# Altium PCB Board.PcbDoc
Units mm, origin at the board's own origin, x right, y up, seen from the top; angles counter-clockwise.
Board outline 38 x 15 mm, 2 copper layers (Top Layer, Bottom Layer), stack 1.57 mm thick; 33 components, 22 nets, 115 pads, 25 vias.
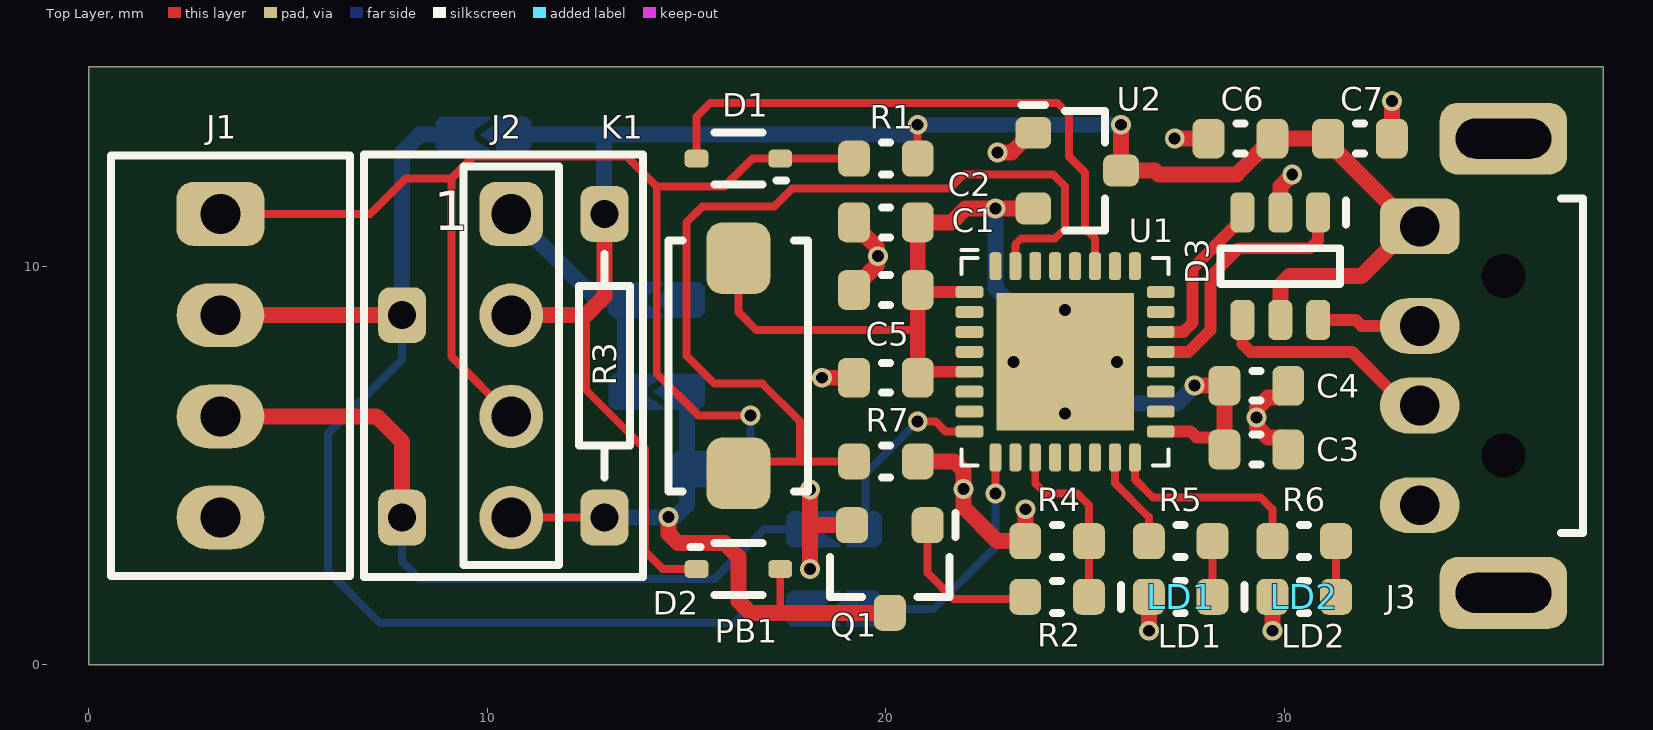
[diagram p0: Top Layer view]
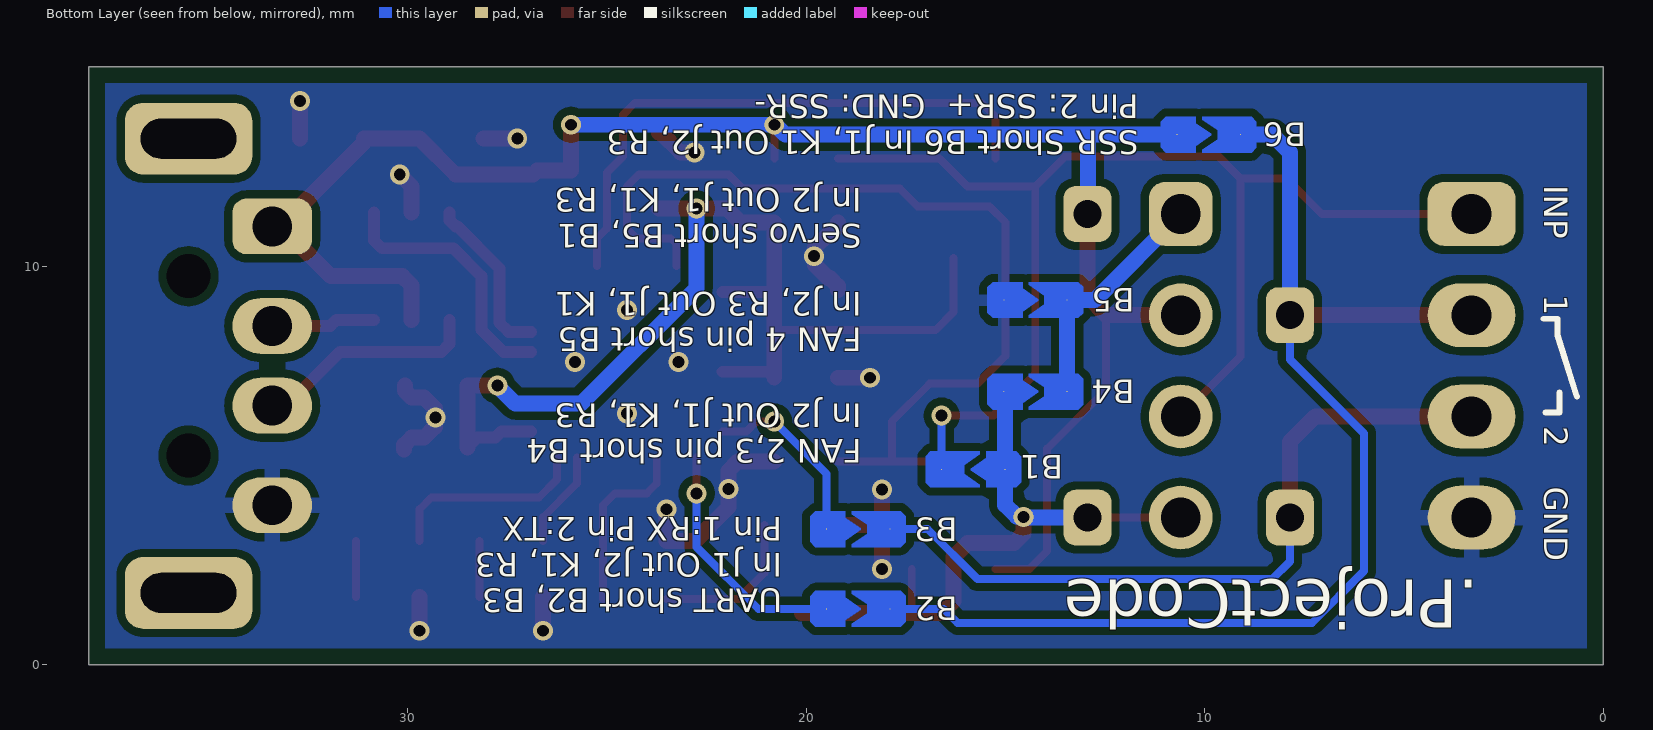
[diagram p1: Bottom Layer view, seen from below]

## Layer stack, top to bottom
Top Solder: solder mask 0.01, SM-001, Dk 3.8
Top Layer: signal copper 0.035
Dielectric 1: core 1.5, FR-4 TG140, Dk 4.5
Bottom Layer: signal copper 0.035
Bottom Solder: solder mask 0.01, SM-001, Dk 3.8

## Board outline
0,0 38,0 38,15 0,15

## Design rules (kind name [scope] priority, off if disabled: settings)
AcuteAngle [All] p1: minimum=6.00000000000000E+0001 checktracksonly=TRUE
AssemblyTestpoint [All] p1: testpointundercomponent=TRUE minsize=1 maxsize=2.5 preferedsize=1.5 minholesize=0 maxholesize=1 preferedholesize=0.8 testpointgrid=0.025 usegrid=TRUE gridtolerance=0 allowsidetop=TRUE allowsidebottom=TRUE
BoardOutlineClearance [(OnLayer('Top Layer') OR OnLayer('Bottom Layer'))] p1: gap=0.4 ignorepadtopadclearanceinfootprint=FALSE
Clearance [All] p1: gap=0.2 ignorepadtopadclearanceinfootprint=FALSE except(0: Arc-Text Track-Text Via-Text Fill-Text Poly-Text Region-Text; 0.1: Arc-Arc Arc-Track Arc-SMDPad Track-Track Track-SMDPad; 0.15: SMDPad-SMDPad; 0.3: Arc-THPad Track-THPad SMDPad-THPad; 0.45: THPad-THPad THPad-Hole)
ComponentClearance ComponentClearance_Special_1 [(InComponent('J1') OR InComponent('J2') OR InComponent('K1') OR InComponent('R3')) vs (InComponent('J1') OR InComponent('J2') OR InComponent('K1') OR InComponent('R3'))] p1: gap=0 collisioncheckmode=3 verticalgap=0 showdistances=FALSE
ComponentClearance ComponentClearance_Special_2 [Footprint Like('_SMD-JUMP-*')] p2: gap=0 collisioncheckmode=3 verticalgap=0 showdistances=FALSE
ComponentClearance ComponentClearance_FID [Footprint Like('FID-1*')] p3: gap=0 collisioncheckmode=3 verticalgap=0 showdistances=FALSE
ComponentClearance [All] p4: gap=0.2 collisioncheckmode=3 verticalgap=0.2 showdistances=FALSE
DiffPairsRouting USB_DiffPairsRouting [InDifferentialPair ('USB_D') Or InDifferentialPair ('USB_CON_D')] p1: maxlimit=0.14 minlimit=0.1 mostfreqgap=0.14 toplayer_minwidth=0.3 toplayer_maxwidth=0.4 toplayer_prefwidth=0.4 bottomlayer_minwidth=0.3 bottomlayer_maxwidth=0.4 bottomlayer_prefwidth=0.4 maxuncoupledlength=10
FabricationTestpoint [All] p1: side=3 testpointundercomponent=TRUE minsize=1 maxsize=2.5 preferedsize=1.5 minholesize=0 maxholesize=1 preferedholesize=0.8 testpointgrid=0.025 allowsidetop=TRUE allowsidebottom=TRUE usegrid=TRUE gridtolerance=0
Height [All] p1: minheight=0 maxheight=50 prefheight=12
HoleSize HoleSize_NPTH [isPad AND NOT PadIsPlated AND NOT HasSlotHole AND IsPadHoleValid] p1: absolutevalues=TRUE maxlimit=100 minlimit=0.5 maxpercent=80.000 minpercent=20.000
HoleSize HoleSize_NPT_Slot [isPad AND NOT PadIsPlated AND HasSlotHole AND IsPadHoleValid] p2: absolutevalues=TRUE maxlimit=10 minlimit=1 maxpercent=80.000 minpercent=20.000
HoleSize HoleSize_PT_Slot [isPad AND PadIsPlated AND HasSlotHole AND IsPadHoleValid] p3: absolutevalues=TRUE maxlimit=10 minlimit=0.5 maxpercent=80.000 minpercent=20.000
HoleSize HoleSize_Pad [IsPad] p4: absolutevalues=TRUE maxlimit=100 minlimit=0.15 maxpercent=80.000 minpercent=20.000
HoleSize HoleSize_Via [IsVia] p5: absolutevalues=TRUE maxlimit=1 minlimit=0.15 maxpercent=80.000 minpercent=20.000
HoleToHoleClearance HoleToHoleClearance_Special_1 [(InComponent('K1') OR InComponent('R3')) vs (InComponent('K1') OR InComponent('R3'))] p1: gap=0 allowstackedmicrovias=TRUE
HoleToHoleClearance HoleToHoleClearance_Via [IsVia vs IsVia] p2: gap=0.2 allowstackedmicrovias=TRUE
HoleToHoleClearance HoleToHoleClearance_Pad [IsPad vs IsPad] p3: gap=0.45 allowstackedmicrovias=TRUE
MatchedLengths USB_MatchedLengths [InDifferentialPair ('USB_D') Or InDifferentialPair ('USB_CON_D')] p1: tolerance=25.4 checknetsindiffpair=FALSE checkdiffpairvsdiffpair=TRUE checkxsignals=TRUE checkothers=TRUE usedelayunits=TRUE delaytolerance=50.000000
MinimumAnnularRing MinimumAnnularRing_NPTH [IsPad AND(PadIsPlated = 'False') AND IsPadHoleValid AND (PadXSize_AllLayers > 0) AND (PadYSize_AllLayers > 0)] p1: minimumring=0
MinimumAnnularRing MinimumAnnularRing_Pad [IsPad] p2: minimumring=0.2
MinimumAnnularRing MinimumAnnularRing_Via [IsVia] p3: minimumring=0.1
MinimumSolderMaskSliver MinimumSolderMaskSliver_UQFN [HasFootprint('UFQFPN32-5x5')] p1: minsoldermaskwidth=0.18
MinimumSolderMaskSliver [All] p2: minsoldermaskwidth=0.2
ParallelSegment [All] p1: limit=200 gap=0.2
PlaneClearance PlaneClearance_Pad [isPad AND PadIsPlated AND IsPadHoleValid] p1: clearance=0.3
PlaneClearance PlaneClearance_Via [isVia] p2: clearance=0.2
PlaneConnect [All] p1: planeconnectstyle=Direct reliefexpansion=0.5 reliefentries=4 reliefconductorwidth=0.2 reliefairgap=0.2
PolygonConnect [All] p1: thpad.connectstyle=Relief thpad.reliefconductorwidth=0.4 thpad.reliefentries=4 thpad.polygonreliefangle="90 Angle" thpad.airgapwidth=0.2 smdpad.connectstyle=Relief smdpad.reliefconductorwidth=0.3 smdpad.reliefentries=4 smdpad.polygonreliefangle="90 Angle" smdpad.airgapwidth=0.2 via.connectstyle=Direct via.reliefconductorwidth=0.2 via.reliefentries=4 via.polygonreliefangle="90 Angle" via.airgapwidth=0.2
ReturnPath [All] p1: impedanceprofileid={BD79DF51-9608-4572-B51F-E232A1A7B7A7} _gaplimit=0.5
RoutingCorners [All] p1: cornerstyle=45-Degree minsetback=0.4 maxsetback=2
RoutingVias [All] p1: holewidth=0.3 width=0.5 viastyle="Through Hole" minholewidth=0.15 minwidth=0.25 maxholewidth=1 maxwidth=2
SMDEntry [All] p1: side=TRUE corner=TRUE anyangle=TRUE
SMDToCorner [All] p1: distance=39370
SilkToSilkClearance SilkToSilkClearancePad [IsPad] p1: silktosilkclearance=0.15
SilkToSilkClearance [All] p2: silktosilkclearance=0.1
SilkToSolderMaskClearance [All] p1: minsilkscreentomaskgap=0.1 clearancetoexposedcopper=FALSE
SolderMaskExpansion SolderMaskExpansion_NPTH [isPad AND(PadIsPlated = 'False') AND IsPadHoleValid AND (PadXSize_AllLayers = 0) AND (PadYSize_AllLayers = 0)] p1: expansion=0.1 istentingtop=FALSE soldermaskfromhole=TRUE
SolderMaskExpansion SolderMaskExpansion_Pad [isPad] p2: expansion=0.04 istentingtop=FALSE
SolderMaskExpansion SolderMaskExpansion_Via [IsVia] p3: expansion=0.05 istentingtop=TRUE
StubLength [All] p1: limit=4
SupplyNets SupplyNets_GND [InNet('GND')] p1: voltage=0.000
SupplyNets SupplyNets+5V [InNet('+5V')] p2: voltage=5.000
SupplyNets SupplyNets+3V3 [InNet('+3V3')] p3: voltage=3.300
UnRoutedNet [All] p1: checkbadconnections=TRUE
ViasUnderSMD ViasUnderSMD_QFN [HasFootprint('UFQFPN32-5x5')] p1: allowed=TRUE
ViasUnderSMD [All] p2: allowed=FALSE
Width [All] p1: maxlimit=5 minlimit=0.1 preferedwidth=0.2 minimp=50.000000 maximp=50.000000 favimp=50.000000
16 further rules are at their usual default settings.

## Classes and differential pairs
differential pair USB_CON_D: +USB_CON_D_P -USB_CON_D_N
differential pair USB_D: +USB_D_P -USB_D_N

## Components (designator, comment, footprint, x,y, rotation, side; value= is the part's Value field where it differs from the comment)
B1 "_SMD-JUMP-0603" _SMD-JUMP-0603 15.8,4.9 r0 bottom
B2 "_SMD-JUMP-0603" _SMD-JUMP-0603 18.7,1.4 r180 bottom
B3 "_SMD-JUMP-0603" _SMD-JUMP-0603 18.7,3.4 r180 bottom
B4 "_SMD-JUMP-0603" _SMD-JUMP-0603 14.25,6.85 r180 bottom
B5 "_SMD-JUMP-0603" _SMD-JUMP-0603 14.25,9.15 r180 bottom
B6 "_SMD-JUMP-0603" _SMD-JUMP-0603 9.9,13.3 r180 bottom
C1 "100nF" C0603-H90 20,9.4 r0 top value=100n
C2 "4.7uF" C0603-H90 20,11.1 r0 top value=4.7u
C3 "100nF" C0603-H90 29.3,5.4 r180 top value=100n
C4 "4.7uF" C0603-H90 29.3,7 r180 top value=4.7u
C5 "100nF" C0603-H90 20,7.2 r0 top value=100n
C6 "4.7uF" C0603-H90 28.9,13.2 r0 top value=4.7u
C7 "4.7uF" C0603-H90 31.9,13.2 r180 top value=4.7u
D1 "BAT54WS-7-F" SOD-323 16.3,12.7 r0 top
D2 "BAT54WS-7-F" SOD-323 16.3,2.4 r180 top
D3 "USBLC6-2SC6" SOT-236 29.9,10 r180 top
J1 "691210910004" 691210910004 3.3,7.5 r270 top
J2 "CO975" FAN-HDR-4P-90DEG 10.6,7.5 r0 top
J3 "USB-AP-S-RA" 48037-0001 35.5,7.5 r90 top
K1 "G6L-1P-DC5" G6L-1P 10.4,7.5 r0 top
LD1 "LTST-C191KRKT" LED-0603-R 27.4,1.7 r0 top
LD2 "LTST-C191KGKT" LED-0603-G 30.5,1.7 r0 top
PB1 "SKQMAQE010" SKQMA-SERIE 16.3,7.5 r270 top
Q1 "BSS138-7-F" SOT-23 20.1,2.4 r90 top
R1 "10KR" R0603-H55 20,12.7 r0 top value=10K
R2 "470R" R0603-H55 24.3,1.7 r0 top value=470
R3 "10KR" RAXIAL-1/8W 12.94,7.5 r180 top value=10K
R4 "10KR" R0603-H55 24.3,3.1 r0 top value=10K
R5 "470R" R0603-H55 27.4,3.1 r0 top value=470
R6 "470R" R0603-H55 30.5,3.1 r0 top value=470
R7 "10KR" R0603-H55 20,5.1 r180 top value=10K
U1 "STM32F042K6U6TR" UFQFPN32-5x5 24.5,7.6 r0 top
U2 "AP7313-33SRG-7" SOT-23 24.8,12.4 r180 top

## Footprints (in the part's own frame and the unit in brackets; to place one, negate y for a bottom-side part, rotate by r counter-clockwise, add the part's x,y. Pads: shape width x height; smd on the part's side, far side on the other; paste and mask are expansions set on the pad)
48037-0001 [mm] "USB Connectors type A plug 4 pin Horizontal"
  rrect50% 1.4x2 hole 1: 1(3.5,2.1)
  oval 1.4x2 hole 1: 2(1,2.1) 3(-1,2.1) 4(-3.5,2.1)
  round 0 hole 1.1 unplated: MH(-2.25,0) MH(2.25,0)
  rrect50% 1.8x3.2 hole 2.4 slot 1 at 0 deg: S(-5.7,0) S(5.7,0)
  body extent -6.35,-17.8 6.35,2.23, height 3.08
691210910004 [mm] "Conn Term Block Header Screw 4 Pos 2.54 mm"
  rrect50% 1.6x2.2 hole 1: 1(-3.81,0)
  oval 1.6x2.2 hole 1: 2(-1.27,0) 3(1.27,0) 4(3.81,0)
  silkscreen extent -5.28,-2.75 5.28,3.25, body extent -5.28,-3.25 5.28,3.25, height 8.51
_SMD-JUMP-0603 [mil] "Option jumper smd 0603"
  round 1 smd paste-99999 mask+1.97: 1(-31.1,0) 2(31.5,0)
  Top Layer region: 47.24,-12.99 42.52,-17.72 9.84,-17.72 -6.3,-17.72 -6.3,-14.96 9.06,-4.33 9.06,4.33 -6.3,14.96 -6.3,17.72 9.84,17.72 42.52,17.72 47.24,12.99
  Top Layer region: -12.6,11.42 2.76,0.79 2.76,-0.79 -12.6,-11.42 -12.6,-17.72 -42.13,-17.72 -47.24,-12.6 -47.24,12.6 -42.13,17.72 -12.6,17.72
C0603-H90 [mm] "Chip Capacitor, 2-Leads, Body 1.60x0.80mm, IPC Medium Density"
  rrect50% 0.8x1 smd: 1(-0.8,0) 2(0.8,0)
  silkscreen extent -0.1,-0.37 0.1,0.38, body extent -0.8,-0.4 0.8,0.4, height 0.9
FAN-HDR-4P-90DEG [mm] "FAN Header - 90 Deg - 1 Row - 4 Pos"
  rrect50% 1.6x1.6 hole 1: 1(0,3.81)
  round 1.6 hole 1: 2(0,1.27) 3(0,-1.27) 4(0,-3.81)
  silkscreen extent -1.2,-5 1.2,5, body extent -13.35,-5.4 0.33,5.4, height 6.36
G6L-1P [mm] "Relay G6L-1P series"
  rrect50% 1.2x1.4 hole 0.7: 2(-2.54,1.27) 4(-2.54,-3.81) 5(2.54,-3.81) 8(2.54,3.81)
  silkscreen extent -3.5,-5.3 3.5,5.3, body extent -3.5,-5.3 3.5,5.3, height 4.11
LED-0603-G [mm] "Chip LED, Green, 2-Leads, Body 1.60x0.8mm, IPC Medium Density"
  rrect50% 0.8x0.9 smd: 1(-0.8,0) 2(0.8,0)
  silkscreen extent -1.5,-0.4 0.1,0.4, body extent -0.8,-0.4 0.8,0.4, height 0.55
LED-0603-R [mm] "Chip LED, Red, 2-Leads, Body 1.60x0.8mm, IPC Medium Density"
  rrect50% 0.8x0.9 smd: 1(-0.8,0) 2(0.8,0)
  silkscreen extent -1.5,-0.4 0.1,0.4, body extent -0.8,-0.4 0.8,0.4, height 0.55
R0603-H55 [mm] "Chip Resistor, 2-Leads, Body 1.60x0.80mm, IPC Medium Density"
  rrect50% 0.8x0.9 smd: 1(-0.8,0) 2(0.8,0)
  silkscreen extent -0.1,-0.4 0.1,0.4, body extent -0.8,-0.4 0.8,0.4, height 0.55
RAXIAL-1/8W [mm] "Resitor Axial through Hole 1/8 W"
  rrect50% 1.2x1.4 hole 0.7: 1(0,3.81) 2(0,-3.81)
  silkscreen extent -0.64,-2 0.64,2, body extent -1,-4.01 1,4.01, height 2
SKQMA-SERIE [mm] "Tacticle Switch"
  rrect50% 1.8x1.6 smd: 1(-2.7,0) 2(2.7,0)
  silkscreen extent -3.15,-1.75 3.15,1.75, body extent -3.15,-1.75 3.15,1.75, height 4.31
SOD-323 [mm] "SODJL, 2-Leads,"
  rrect50% 0.6x0.45 smd: 1(1.05,0) 2(-1.05,0)
  silkscreen extent -0.6,-0.65 1.2,0.65, body extent -1.26,-0.65 1.26,0.65, height 1.11
SOT-23 [mm] "SOT23, 3-Leads, Body 2.90x2.45mm, Pitch 0.95mm, IPC Medium Density"
  rrect50% 0.9x0.8 smd: 1(1.1,-0.95) 2(1.1,0.95) 3(-1.1,0)
  silkscreen extent -0.7,-1.65 1.4,1.5, body extent -1.25,-1.5 1.25,1.5, height 1.1
SOT-236 [mm] "SOT23, 6-Leads, Body 2.85x2.80mm, Pitch 0.95mm, IPC Medium Density"
  rrect50% 0.6x1 smd: 1(-0.95,-1.35) 2(0,-1.35) 3(0.95,-1.35) 4(0.95,1.35) 5(0,1.35) 6(-0.95,1.35)
  silkscreen extent -1.65,-1.65 1.5,0.45, body extent -1.5,-1.5 1.5,1.5, height 1.45
UFQFPN32-5x5 [mm]
  rrect50% 0.7x0.3 smd: 1(-2.4,1.75) 2(-2.4,1.25) 3(-2.4,0.75) 4(-2.4,0.25) 5(-2.4,-0.25) 6(-2.4,-0.75) 7(-2.4,-1.25) 8(-2.4,-1.75) 17(2.4,-1.75) 18(2.4,-1.25) 19(2.4,-0.75) 20(2.4,-0.25) 21(2.4,0.25) 22(2.4,0.75) 23(2.4,1.25) 24(2.4,1.75)
  rrect50% 0.3x0.7 smd: 9(-1.75,-2.4) 10(-1.25,-2.4) 11(-0.75,-2.4) 12(-0.25,-2.4) 13(0.25,-2.4) 14(0.75,-2.4) 15(1.25,-2.4) 16(1.75,-2.4) 25(1.75,2.4) 26(1.25,2.4) 27(0.75,2.4) 28(0.25,2.4) 29(-0.25,2.4) 30(-0.75,2.4) 31(-1.25,2.4) 32(-1.75,2.4)
  rect 3.45x3.45 smd paste-3.45: 33(0,0)
  silkscreen extent -2.6,-2.6 2.6,2.8, body extent -2.6,-2.6 2.6,2.6, height 0.56

## Part data
B1 B2 B3 B4 B5 B6: "Option Jumper smd 0603", Case=0603, Mount="Surface Mount"
C1 C3 C5: library part CGA3E2X7R1H104K080AA, "Cap 0603 Case Ceramic 100nF 50V X7R", Case=0603, Dielectric=X7R, Manufacturer=TDK, Voltage Rating=50V, Capacitance=100nF, ComponentLink1Description="Data Sheet", ComponentLink1URL=https://product.tdk.com/system/files/dam/doc/product/capacitor/ceramic/mlcc/catalog/mlcc_commercial_general_en.pdf, Manufacturer Part Number=CGA3E2X7R1H104K080AA, Mount="Surface Mount"
C2 C4 C6 C7: library part GRM188Z71C475KE21D, "Cap 0603 Case Ceramic 4.7uF 16V X7R", Case=0603, Dielectric=X7R, Manufacturer=Murata, Voltage Rating=16V, Capacitance=4.7uF, ComponentLink1Description="Data Sheet", ComponentLink1URL=https://www.murata.com/en-eu/products/productdetail?partno=GRM188Z71C475KE21%23, Manufacturer Part Number=GRM188Z71C475KE21D, Mount="Surface Mount"
D1 D2: "Diode Schottky 30V 0.1A, Vf 400mV@10mA SOD-323", Case=SOD-323, Current Rating=0.1A, Manufacturer=Diodes, ComponentLink1Description="Data Sheet", ComponentLink1URL=https://eu.mouser.com/datasheet/2/115/DIOD_S_A0004140728_1-2542383.pdf, Manufacturer Part Number=BAT54WS-7-F, Mount="Surface Mount"
D3: "ESD Protection Diodes / TVS Diodes 2 Line 2.5pF USB 2.0 ESD Protect SOT23-6", Case=SOT-23-6, Manufacturer=STMicroelectronics, ComponentLink1Description="Data Sheet", ComponentLink1URL=https://www.mouser.it/datasheet/2/389/usblc6_2-1852789.pdf, Manufacturer Part Number=USBLC6-2SC6, Mount="Surface Mount"
J1: "Conn Term Block Header Screw 2.54 mm 4 Pos 6A 150V", Current Rating=6A, Manufacturer="Wurth Electronics", Voltage Rating=150V, ComponentLink1Description="Data Sheet", ComponentLink1URL=https://www.we-online.com/components/products/datasheet/691210910002.pdf, Manufacturer Part Number=691210910004, Mount="Through Hole"
J2: "Conn Post Header - PWM Fan - 90 Deg - 4 Pos - Series KK254", Current Rating=4A, Manufacturer=Moddy, Voltage Rating=250V, ComponentLink1Description="Data Sheet", ComponentLink1URL=https://www.moddiy.com/products/4-Pin-3-Pin-2.54mm-Pitch-2510-Fan-Male-Angled-Connector-Black.html?srsltid=AfmBOopaZVadWC9c1TxHb48VLoAs6cq4o3WMRMmuPV4D0msjLx6o7yLs, Manufacturer Part Number=CO975, Mount="Through Hole"
J3: "Conn USB Type A Plug Right-Anglel TH", Current Rating=1A, Manufacturer="Adam Tech", Voltage Rating=30V, ComponentLink1Description="Data Sheet", ComponentLink1URL=https://www.mouser.it/datasheet/2/4/usb_ap_s_ra_data_sheet-3396036.pdf, Manufacturer Part Number=USB-AP-S-RA, Mount="Through Hole"
K1: "Relay Low Signal Sealed SPST-NO 1A 5VDC Through Hole Tube", Manufacturer=Omron, ComponentLink1Description="Data Sheet", ComponentLink1URL=http://www.farnell.com/datasheets/1846831.pdf, Manufacturer Part Number=G6L-1P-DC5, Mount="Through Hole"
LD1: "LED 0603 Top Red 631nm 2-Pin", Case=0603, Manufacturer="Vishay Semiconductors", ComponentLink1Description="Data Sheet", ComponentLink1URL=https://optoelectronics.liteon.com/upload/download/DS22-2000-223/LTST-C191KRKT.PDF, Manufacturer Part Number=LTST-C191KRKT, Mount="Surface Mount"
LD2: "LED 0603 Top Green 571nm 2-Pin", Case=0603, Manufacturer="Vishay Semiconductors", ComponentLink1Description="Data Sheet", ComponentLink1URL=https://optoelectronics.liteon.com/upload/download/DS22-2000-228/LTST-C191KGKT.PDF, Manufacturer Part Number=LTST-C191KGKT, Mount="Surface Mount"
PB1: "Tactile Switch Rectangular 6.00x3.55mm. Height 4.3mm. J-Lead 50mA 12VDC 260gf SMD", Current Rating="50 mA", Manufacturer="Alps Alpine", Voltage Rating=12V, ComponentLink1Description="Data Sheet", ComponentLink1URL=https://eu.mouser.com/datasheet/2/15/SKQM-1370716.pdf, Manufacturer Part Number=SKQMAQE010, Mount="Surface Mount"
Q1: "Mosfet N 50V Vds 20V Vgs 1.4R SOT-23", Case=SOT-23, Manufacturer=Diodes, ComponentLink1Description="Data Sheet", ComponentLink1URL=https://www.diodes.com/assets/Datasheets/ds30144.pdf, Manufacturer Part Number=BSS138-7-F, Mount="Surface Mount"
R1 R4 R7: library part RC0603FR-0710KL, "Resistor 0603 Case 10KR 1% 1/10W", Case=0603, Manufacturer=Yageo, Voltage Rating=150V, ComponentLink1Description="Data Sheet", ComponentLink1URL=https://datasheet.ciiva.com/2519/pyu-r-int-thick-7-2519712.pdf, Manufacturer Part Number=RC0603FR-0710KL, Mount="Surface Mount", Resistance=10KR
R2 R5 R6: library part RC0603FR-07470RL, "Resistor 0603 Case 470R 1% 1/10W", Case=0603, Manufacturer=Yageo, Voltage Rating=150V, ComponentLink1Description="Data Sheet", ComponentLink1URL=https://datasheet.ciiva.com/11808/0900766b8106beab-11808155.pdf, Manufacturer Part Number=RC0603FR-07470RL, Mount="Surface Mount", Resistance=470R
R3: library part RNF18FTD10K0, "Resistor Axial 10KR 1% 1/8W", Case="Through Hole", Manufacturer="SEI Stackpole", Voltage Rating=200V, ComponentLink1Description="Data Sheet", ComponentLink1URL=https://www.seielect.com/Catalog/SEI-RNF_RNMF.pdf, Manufacturer Part Number=RNF18FTD10K0, Mount="Through Hole", Resistance=10KR
U1: "STM32 Arm Cortex-M0 USB line MCU 32 Kbytes of Flash 48 MHz CPU USB CAN CEC", Case=UFQFPN32, Frequency="48 MHz", Manufacturer=STMicroelectronics, ComponentLink1Description=DataSheet, ComponentLink1URL=https://www.st.com/resource/en/datasheet/stm32f042f4.pdf, Manufacturer Part Number=STM32F042K6U6TR, Mount="Surface Mount"
U2: "LDO 3.3V 150mA Out  6Vin 130mV Dropout, Quiescent current 65uA Startup 80µs SOT-23", Case=SOT-23, Manufacturer=Diodes, ComponentLink1Description="Data Sheet", ComponentLink1URL=https://www.diodes.com/assets/Datasheets/AP7313.pdf, Manufacturer Part Number=AP7313-33SRG-7, Mount="Surface Mount"

## Via types
v1: diameter 0.5, hole 0.3, Top Layer to Bottom Layer, tented both sides, 25 vias

## Nets (pads, with @x,y where several pads share a name; then routed paths per layer and width w, separated by ;. In a path a pad name is that pad's centre, name@x,y a point inside that pad or via, vN(x,y) a via of type N, cw(c..) or ccw(c..) an arc to the next point about the centre after c; other vN are vias at no path point)
+3V3: C1.2 C2.2 C3.2 C4.2 C5.2 PB1.1 U1.1 U1.5 U1.17 U2.2 | length 28.2
  Top Layer w0.2: PB1.1 16.3,8.85 16.75,8.4 20.8,8.4
  Top Layer w0.3: C5.2 20.95,7.35 U1.5 ; C1.2 20.85,9.35 U1.1 ; U1.17 27.65,5.85 27.8,5.7 28.254,5.7 28.5,5.454 C3.2
  Top Layer w0.4: C5.2 20.8,8.4 C1.2 C2.2 21.65,11.1 22,11.45 v1(22.75,11.45) U2.2 ; v1(27.75,7) C4.2 C3.2@28.5,5.454
  Bottom Layer w0.4: v1(22.75,11.45) 22.75,9.45 25.65,6.55 27.3,6.55 v1(27.75,7)
+5V: B6.1 C6.2 C7.2 D2.1 D3.5 J2.2 J3.1 K1.8 R1.2 R3.2 U2.3 | length 45.6
  Top Layer w0.2: 12.47,8.77 12.47,6.9 13.95,5.42 13.95,2.85 14.4,2.4 D2.1 ; R1.2 v1(20.8,13.55)
  Top Layer w0.4: J2.2 12.47,8.77 12.94,9.24 K1.8 ; v1(25.9,13.55) U2.3 26.75,12.4 26.85,12.3 28.8,12.3 C6.2 C7.2 31.1,13.1 32.693,11.507 32.693,11.489 J3.1@33.181,11 ; D3.5 29.9,9.516 30.134,9.75 31.931,9.75 J3.1@33.181,11 ; J3.1 J3.1@33.181,11
  Bottom Layer w0.4: B6.1 12.93,13.3 ; K1.8@12.93,11.32 12.93,13.3 ; v1(25.9,13.55) 20.773,13.55 20.523,13.3 12.93,13.3
COIL-CTL: R2.2 R4.2 U1.11 | length 4.6
  Top Layer w0.2: U1.11 23.75,4.55 24,4.3 24.8,4.3 25.1,4 R2.2@25.1,1.65
GND: B5.1 C1.1 C2.1 C3.1 C4.1 C5.1 C6.1 C7.1 D3.2 J1.4 J3.4 LD1.1 LD2.1 Q1.2 R4.1 R7.1 U1.33 U2.1 | length 19.3
  Top Layer w0.4: v1(18.1,2.4) 18.1,3.4 ; v1(18.1,4.4) 18.1,3.4 ; v1(18.4,7.2) C5.1 ; Q1.2 18.2,3.5 18.1,3.4 ; C1.1 19.2,9.5 19.4,9.7 19.45,9.7 19.781,10.031 19.781,10.231 v1(19.8,10.25) 19.781,10.269 19.781,10.469 19.45,10.8 19.4,10.8 19.2,11 C2.1 ; R7.1 21.716,5.1 21.95,4.866 v1(21.95,4.408) 21.95,3.95 22.8,3.1 R4.1 v1(23.5,3.9) ; v1@22.803,12.853 23.153,12.853 23.65,13.35 U2.1 ; v1(26.6,0.85) LD1.1 ; v1(27.25,13.2) C6.1 ; v1(29.7,0.85) LD2.1 ; D3.2 29.9,12 v1(30.2,12.3) ; C4.1@30.073,7 30.073,6.873 29.9,6.7 29.584,6.7 29.319,6.435 29.319,6.219 v1(29.3,6.2) 29.319,6.181 29.319,5.965 29.584,5.7 29.9,5.7 30.091,5.509 C3.1@30.091,5.4 ; C7.1 v1(32.7,14.15)
  other v1: 24.5,6.3 23.2,7.6 25.8,7.6 24.5,8.9 22.8,12.85
IN_TACH: B1.2 D1.1 J1.1 J2.3 R1.1 | length 32.5
  Top Layer w0.2: J1.1 7.06,11.31 7.95,12.2 9.1,12.2 ; J2.3 9.1,7.73 9.1,12.2 ; v1(16.6,6.25) 15.3,6.25 14.25,7.3 14.25,12 ; R1.1 D1.1 16.65,12.7 15.95,12 14.25,12 ; 9.1,12.2 9.65,12.75 13.5,12.75 14.25,12
  Bottom Layer w0.2: B1.2 v1(16.6,6.25)
IN_TACH_D: D1.2 U1.27 | length 14.7
  Top Layer w0.2: D1.2 15.25,13.75 15.6,14.1 24.3,14.1 24.6,13.8 24.6,12.75 25,12.35 25,10.95 25.25,10.7 U1.27
LED_OFF: R6.1 U1.16 | length 5.1
  Top Layer w0.2: U1.16 26.25,4.65 26.7,4.2 29.4,4.2 29.7,3.9 R6.1
LED_ON: R5.1 U1.15 | length 2.5
  Top Layer w0.2: U1.15 25.75,4.55 26.6,3.7 R5.1
MAN_SW: PB1.2 R7.2 U1.31 | length 24
  Top Layer w0.2: PB1.2 16.6,5.1 17.85,5.1 ; R7.2 17.85,5.1 ; U1.31 23.25,10.55 23.4,10.7 24.25,10.7 24.5,10.95 24.5,12 24.2,12.3 21.95,12.3 21.6,11.95 17.65,11.95 17.2,11.5 15.4,11.5 15,11.1 15,7.75 15.7,7.05 16.9,7.05 17.85,6.1 17.85,5.1
NetLD1_2: LD1.2 R5.2 | length 1.4
  Top Layer w0.2: LD1.2 R5.2
NetLD2_2: LD2.2 R6.2 | length 1.4
  Top Layer w0.2: LD2.2 R6.2
NetQ1_1: Q1.1 R2.1 | length 3.9
  Top Layer w0.2: Q1.1 21.05,2.3 21.7,1.65 R2.1@23.5,1.65
OUT_PWM: B1.1 B4.1 D2.2 J2.4 K1.5 Q1.3 R3.1 | length 16
  Top Layer w0.2: J2.4 K1.5 ; 17.35,1.25 17.35,1.3 D2.2
  Top Layer w0.4: v1(14.55,3.7) 14.55,3.284 14.784,3.05 15.95,3.05 16.3,2.7 16.3,1.6 16.6,1.3 17.35,1.3 Q1.3
  Bottom Layer w0.4: K1.5@12.942,3.692 14.542,3.692 v1(14.55,3.7) 14.569,3.719 14.719,3.719 15.01,4.01 B1.1 15.01,6.85
PIN_1: B2.2 B6.2 J1.2 K1.2 | length 29.8
  Top Layer w0.4: J1.2 K1.2
  Bottom Layer w0.2: K1.2 7.86,7.66 6,5.8 6,2.35 7.3,1.05 16.2,1.05 16.55,1.4 B2.2
  Bottom Layer w0.4: K1.2 7.86,12.86 8.3,13.3 B6.2
PIN_2: B3.2 J1.3 K1.4 | length 18.6
  Top Layer w0.4: J1.3 7.22,6.23 7.86,5.59 K1.4
  Bottom Layer w0.2: K1.4 7.86,2.59 8.3,2.15 15.7,2.15 16.95,3.4 B3.2
PWM/GND: B4.2 B5.2 J2.1 | length 6
  Bottom Layer w0.4: J2.1 12.76,9.15 B5.2 B4.2
UART_RX: B2.1 U1.9 | length 6.2
  Top Layer w0.2: v1(22.75,4.3) U1.9
  Bottom Layer w0.2: B2.1 21.2,1.4 22.75,2.95 v1(22.75,4.3)
UART_TX: B3.1 U1.8 | length 4.6
  Top Layer w0.2: v1(20.8,6.1) 21.25,6.1 21.5,5.85 U1.8
  Bottom Layer w0.2: B3.1 19.49,4.79 v1(20.8,6.1)
USB_CON_D_N: D3.6 J3.2 | length 2.6
  Top Layer w0.3: D3.6 31.793,8.65 31.943,8.5 J3.2
USB_CON_D_P: D3.4 J3.3 | length 5.7
  Top Layer w0.3: D3.4 28.95,8.05 29.15,7.85 31.7,7.85 33.05,6.5 J3.3
USB_D_N: D3.1 U1.21 | length 6.6
  Top Layer w0.3: U1.21 27.6,7.85 28.15,8.4 28.15,9.75 28.85,10.45 30.65,10.45 30.85,10.65 D3.1
USB_D_P: D3.3 U1.22 | length 4.2
  Top Layer w0.3: U1.22 27.466,8.35 27.7,8.585 27.7,9.949 28.751,11 28.8,11 28.95,11.15 D3.3
pads on no net: J3.MH J3.S U1.2 U1.3 U1.4 U1.6 U1.7 U1.10 U1.12 U1.13 U1.14 U1.18 U1.19 U1.20 U1.23 U1.24 U1.25 U1.26 U1.28 U1.29 U1.30 U1.32

## Polygon pours and split planes (outlines as drawn)
GND on Bottom Layer "BOTTOM_LAYER_GND" (solid, remove dead copper, pour order 0): -0.05,15 38,15 38,0 -0.05,0

## Keep-outs
Keep-Out Layer:
  lines w0.1: 0.5,73 0.5,73

## Silkscreen, mask and mechanical layers (free items; w line width, h text height)
Top Overlay:
  lines w0.2: 12.94,4.7 12.94,5.5 ; 12.94,9.5 12.94,10.3 ; 18.05,4.5 18.05,10.5 ; 36.95,3.3 37.5,3.3 37.5,7.5 37.5,11.7 36.95,11.7
  text "LD1" at 26.82,0.42 h0.6
  text "LD2" at 29.92,0.42 h0.6
Bottom Overlay:
  lines w0.15: 0.658,6.733 1.142,8.267 1.142,8.68 1.492,8.68 ; 1.092,6.835 1.092,6.332 1.442,6.332
  text "SSR Short B6 In J1, K1 Out J2, R3 / Pin 2: SSR+  GND: SSR-" at 11.65,14.3 h0.6 r180
  text "INP" at 1.48,12.03 h0.6 r90
  text "Servo short B5, B1 / In J2 Out J1, K1, R3" at 18.6,11.95 h0.6 r180
  text "FAN 4 pin short B5 / In J2, R3 Out J1, K1" at 18.6,9.35 h0.6 r180
  text "1" at 1.48,9.28 h0.6 r90
  text "FAN 2,3 pin short B4 / In J2 Out J1, K1, R3" at 18.6,6.55 h0.6 r180
  text "2" at 1.48,5.98 h0.6 r90
  text "GND" at 1.48,4.469 h0.6 r90
  text "UART short B2, B3 / In J1 Out J2, K1, R3 / Pin 1:RX Pin 2:TX" at 20.6,3.7 h0.6 r180
  text ".ProjectCode" at 3.12,2.13 h1.2 r180
Top Solder:
  rectangle: 22.75,9.61 26.25,10.39
  region: 26.51,9.35 26.51,5.85 27.29,5.85 27.29,9.35
  region: 26.25,5.59 22.75,5.59 22.75,4.81 26.25,4.81
  region: 22.49,5.85 22.49,9.35 21.71,9.35 21.71,5.85
Board Shape:
  the board outline again, w0.1

## Text inside footprints (layer, text, board x,y; h text height)
J2: Top Overlay "1" at 8.65,10.9 h1